# Altium PCB PCB1.PcbDoc
Units mil, origin at the board's own origin, x right, y up, seen from the top; angles counter-clockwise.
Board outline 2287.2 x 1638.61 mil, 2 copper layers (Top Layer, Bottom Layer), stack 65.792 mil thick; 4 components, 11 nets, 51 pads, 4 vias.
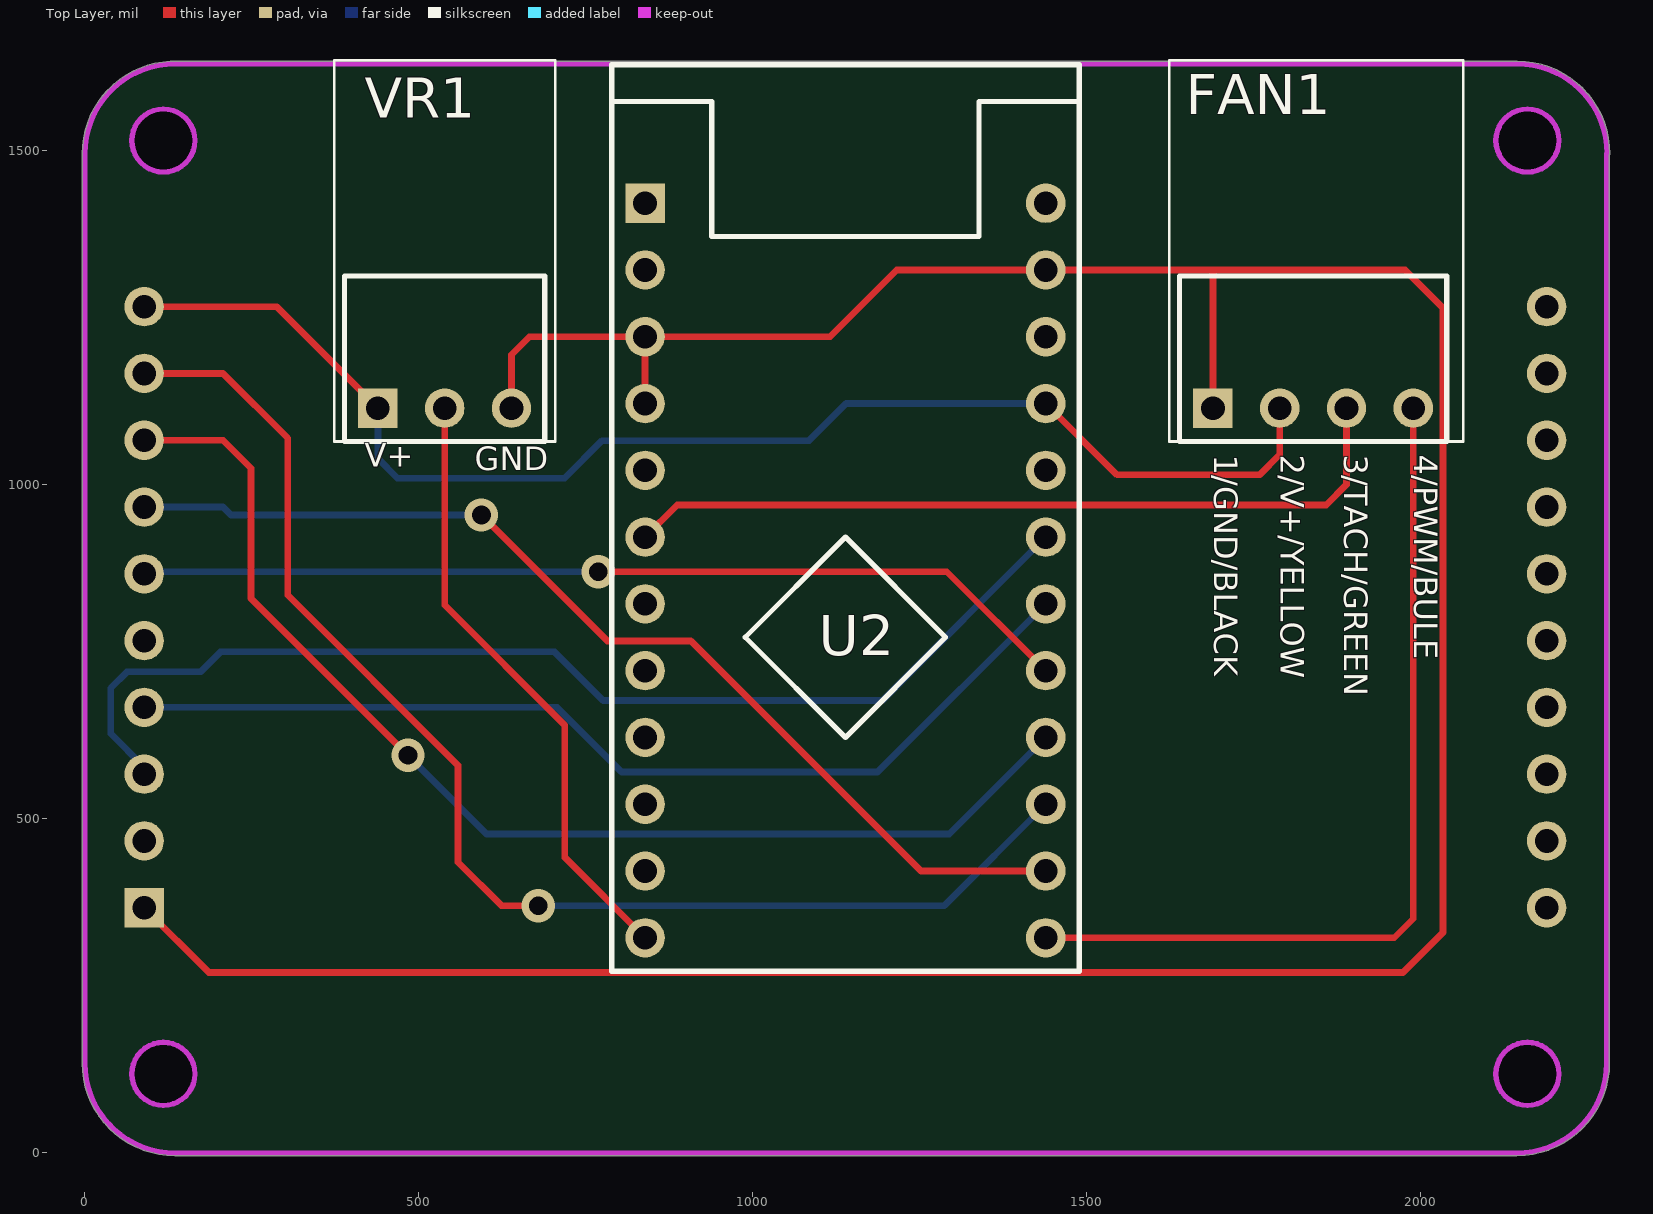
[diagram p0: Top Layer view]
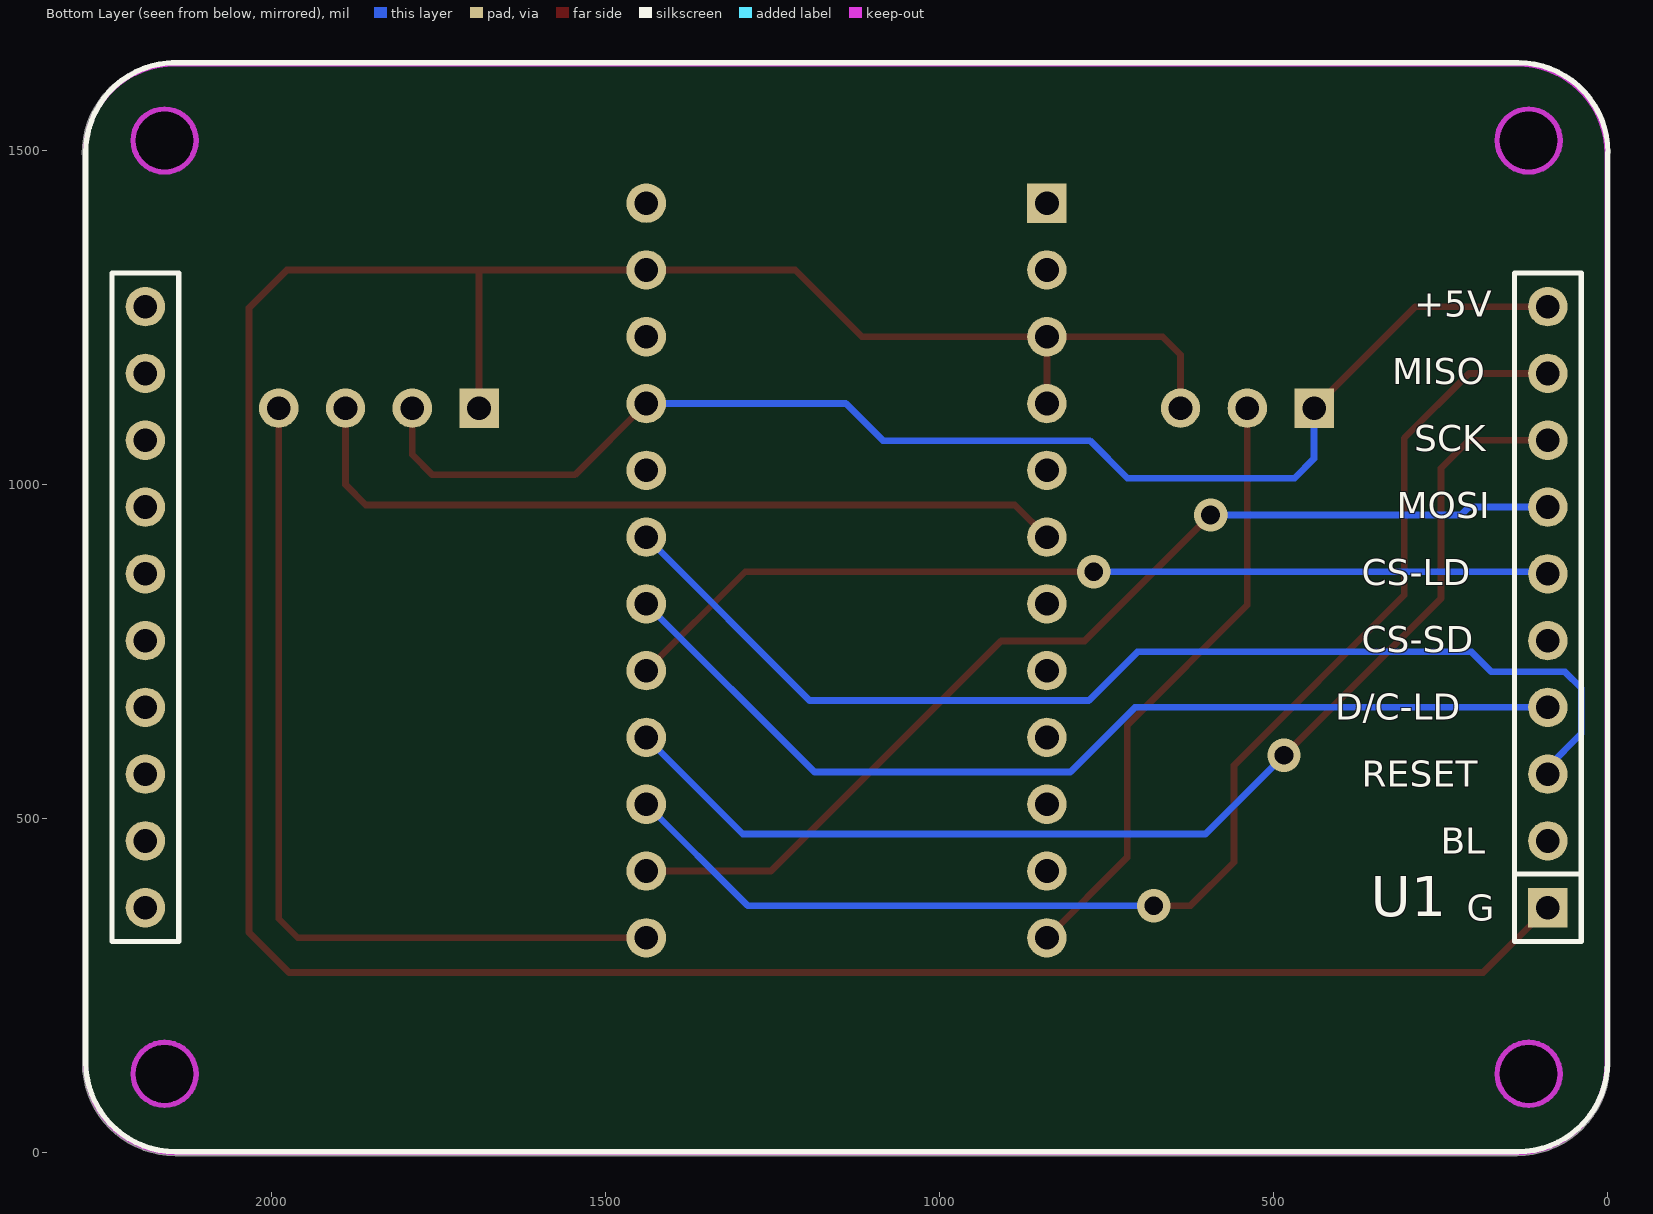
[diagram p1: Bottom Layer view, seen from below]

## Layer stack, top to bottom
Top Layer: signal copper 1.4
Dielectric: core 62.9921, FR-4, Dk 4.8
Bottom Layer: signal copper 1.4

## Board outline
-3.32,134.06 -3.32,1495.94 cw(c135.05,1495.94) 128.7,1634.16 cw(c129.76,1630.35) 129.76,1634.31 2145.51,1634.31 cw(c2145.51,1495.94) 2283.88,1495.94 cw(c2279.93,1495.94) 2283.32,1493.91 2283.32,134.06 cw(c2144.95,134.06) 2144.95,-4.31 135.05,-4.31 cw(c135.05,134.06)
cut-out: 2207.87,118.11 cw(c2160.63,118.11) 2160.63,70.87 cw(c2160.63,118.11) 2113.39,118.11 cw(c2160.63,118.11) 2160.63,165.35 cw(c2160.63,118.11)
cut-out: 2207.87,1515.59 ccw(c2160.63,1515.59) 2160.63,1562.83 ccw(c2160.63,1515.59) 2113.39,1515.59 ccw(c2160.63,1515.59) 2160.63,1468.35 ccw(c2160.63,1515.59)
cut-out: 70.87,1515.59 cw(c118.11,1515.59) 118.11,1562.83 cw(c118.11,1515.59) 165.35,1515.59 cw(c118.11,1515.59) 118.11,1468.35 cw(c118.11,1515.59)
cut-out: 70.87,118.11 ccw(c118.11,118.11) 118.11,70.87 ccw(c118.11,118.11) 165.35,118.11 ccw(c118.11,118.11) 118.11,165.35 ccw(c118.11,118.11)

## Design rules (kind name [scope] priority, off if disabled: settings)
Clearance [All] p1: gap=10
ComponentClearance [All] p1: gap=0 collisioncheckmode=3 verticalgap=0 showdistances=FALSE
PolygonConnect [All] p1: connectstyle=Relief reliefconductorwidth=10 reliefentries=4 polygonreliefangle="90 Angle"
RoutingVias [All] p1: holewidth=28 width=50 viastyle="Through Hole" minholewidth=28 minwidth=50 maxholewidth=28 maxwidth=50
SilkToSilkClearance [All] p1: silktosilkclearance=0
SilkscreenOverComponentPads [All] p1: minsilkscreentomaskgap=0
SolderMaskExpansion [All] p1: expansion=4
Width [All] p1: maxlimit=10 minlimit=10 preferedwidth=10
25 further rules are at their usual default settings.

## Components (designator, comment, footprint, x,y, rotation, side; value= is the part's Value field where it differs from the comment)
FAN1 "4WIRE FAN" "WR-WTB 2,54mm 1X4" 1689.72,1114.96 r0 top
U1 "TFTLCD" TFTLCD 1139.37,816.85 r180 bottom locked
U2 "Pro Micro" PROMICRO 1139.37,871.81 r0 top locked
VR1 "3590S-2-103L" "WR-WTB 2,54mm 1X3" 439.37,1114.96 r0 top

## Footprints (in the part's own frame and the unit in brackets; to place one, negate y for a bottom-side part, rotate by r counter-clockwise, add the part's x,y. Pads: shape width x height; smd on the part's side, far side on the other; paste and mask are expansions set on the pad)
PROMICRO [mm]
  rect 1.5x1.5 hole 0.9: 1(-7.62,13.97)
  round 1.5 hole 0.9: 2(-7.62,11.43) 3(-7.62,8.89) 4(-7.62,6.35) 5(-7.62,3.81) 6(-7.62,1.27) 7(-7.62,-1.27) 8(-7.62,-3.81) 9(-7.62,-6.35) 10(-7.62,-8.89) 11(-7.62,-11.43) 12(-7.62,-13.97) 13(7.62,-13.97) 14(7.62,-11.43) 15(7.62,-8.89) 16(7.62,-6.35) 17(7.62,-3.81) 18(7.62,-1.27) 19(7.62,1.27) 20(7.62,3.81) 21(7.62,6.35) 22(7.62,8.89) 23(7.62,11.43) 24(7.62,13.97)
  silkscreen extent -8.89,-15.24 8.89,19.24
TFTLCD [mm]
  round 1.5 hole 0.9: 0(-26.67,-11.43) 0(-26.67,-8.89) 0(-26.67,-6.35) 0(-26.67,-3.81) 0(-26.67,-1.27) 0(-26.67,1.27) 0(-26.67,3.81) 0(-26.67,6.35) 0(-26.67,8.89) 0(-26.67,11.43) 2(26.67,-8.89) 3(26.67,-6.35) 4(26.67,-3.81) 5(26.67,-1.27) 6(26.67,1.27) 7(26.67,3.81) 8(26.67,6.35) 9(26.67,8.89) 10(26.67,11.43)
  rect 1.5x1.5 hole 0.9: 1(26.67,-11.43)
  silkscreen extent -28.94,-20.71 28.95,20.71
"WR-WTB 2,54mm 1X3" [mm] "WR-WTB 2,54mm"
  rect 1.5x1.5 hole 0.9: 1(0,0)
  round 1.5 hole 0.9: 2(2.54,0) 3(5.08,0)
  silkscreen extent -1.66,-1.27 6.74,13.23, body extent -1.27,-0.3 6.35,13.22, height 8.9
"WR-WTB 2,54mm 1X4" [mm] "WR-WTB 2.54 mm Male Locking Header"
  rect 1.5x1.5 hole 0.9: 1(0,0)
  round 1.5 hole 0.9: 2(2.54,0) 3(5.08,0) 4(7.62,0)
  silkscreen extent -1.66,-1.27 9.53,13.23, body extent -1.27,-0.3 6.35,13.22, height 8.9

## Part data
FAN1: library part 4-WIRE_FAN
U2: library part ProMicro

## Via types
v1: diameter 50, hole 28, Top Layer to Bottom Layer, 4 vias

## Nets (pads, with @x,y where several pads share a name; then routed paths per layer and width w, separated by ;. In a path a pad name is that pad's centre, name@x,y a point inside that pad or via, vN(x,y) a via of type N, cw(c..) or ccw(c..) an arc to the next point about the centre after c; other vN are vias at no path point)
CS-LD: U1.6 U2.17 | length 1412.7
  Top Layer w10: v1(769.37,869.96) 1291.22,869.96 U2.17
  Bottom Layer w10: U1.6 92.48,869.96 v1(769.37,869.96)
D/C-LD: U1.4 U2.18 | length 1494.5
  Bottom Layer w10: U1.4 707.48,666.85 804.37,569.96 1187.52,569.96 U2.18
GND: FAN1.1 U1.1 U2.3 U2.4 U2.23 VR1.3 | length 4802.8
  Top Layer w10: U1.1 186.26,269.96 1974.37,269.96 2034.25,329.84 2034.25,1265.08 1977.52,1321.81 1689.72,1321.81 ; VR1.3 639.37,1194.96 666.22,1221.81 1116.22,1221.81 1216.22,1321.81 U2.23 1689.72,1321.81 ; U2.4 U2.3 ; FAN1.1 1689.72,1321.81
MISO: U1.9 U2.15 | length 1965.6
  Top Layer w10: U1.9 207.48,1166.85 304.37,1069.96 304.37,834.96 559.37,579.96 559.37,434.96 624.37,369.96 v1(679.37,369.96)
  Bottom Layer w10: v1(679.37,369.96) 1287.52,369.96 U2.15
MOSI: U1.7 U2.14 | length 1575.8
  Top Layer w10: v1(594.37,954.96) 782.99,766.34 907.99,766.34 1252.52,421.81 U2.14
  Bottom Layer w10: U1.7 207.48,966.85 219.37,954.96 v1(594.37,954.96)
NetU2_12: U2.12 VR1.2 | length 917.4
  Top Layer w10: VR1.2 539.37,819.96 719.37,639.96 719.37,441.81 U2.12
PWM: FAN1.4 U2.13 | length 1326.8
  Top Layer w10: U2.13 1961.22,321.81 1989.72,350.32 FAN1.4
RESET: U1.3 U2.19 | length 1703.4
  Bottom Layer w10: U1.3 89.37,577.8 39.37,627.8 39.37,695.63 63.74,720 173.74,720 203.66,749.92 703.94,749.92 776.57,677.28 1194.84,677.28 U2.19
SCK: U1.8 U2.16 | length 1768.3
  Top Layer w10: U1.8 207.48,1066.85 249.37,1024.96 249.37,829.96 v1(484.37,594.96)
  Bottom Layer w10: v1(484.37,594.96) 602.05,477.28 1294.84,477.28 U2.16
TACH: FAN1.3 U2.6 | length 1197.5
  Top Layer w10: U2.6 887.52,969.96 1859.37,969.96 1889.72,1000.32 FAN1.3
VCC: FAN1.2 U1.10 U2.21 VR1.1 | length 2023.8
  Top Layer w10: U1.10 287.48,1266.85 VR1.1 ; U2.21 1546.22,1014.96 1759.37,1014.96 1789.72,1045.32 FAN1.2
  Bottom Layer w10: VR1.1 439.37,1039.37 468.74,1010 718.74,1010 775.08,1066.34 1085.08,1066.34 1140.55,1121.81 U2.21
pads on no net: U1.0 U1.2 U1.5 U2.1 U2.2 U2.5 U2.7 U2.8 U2.9 U2.10 U2.11 U2.20 U2.22 U2.24

## Keep-outs
Keep-Out Layer:
  circle w7.87: c2160.63,118.11 r47.24
  circle w7.87: c2160.63,1515.59 r47.24
  circle w7.87: c118.11,1515.59 r47.24
  circle w7.87: c118.11,118.11 r47.24
  lines w7.87: 129.76,1630.35 2145.51,1630.35 cw(c2145.51,1495.94) 2279.93,1495.94 ; 135.05,1630.35 ccw(c135.05,1495.94) 0.63,1495.94 0.63,134.06 ccw(c135.05,134.06) 135.05,-0.35 2144.95,-0.35 ccw(c2144.95,134.06) 2279.37,134.06 2279.37,1495.94

## Silkscreen, mask and mechanical layers (free items; w line width, h text height)
Top Overlay:
  text "1/GND/BLACK" at 1679.37,1044.96 h60 r270
  text "2/V+/YELLOW" at 1779.37,1044.96 h60 r270
  text "3/TACH/GREEN" at 1874.37,1044.96 h60 r270
  text "4/PWM/BULE" at 1979.37,1044.96 h60 r270
  text "V+" at 419.37,1014.96 h60
  text "GND" at 584.37,1009.96 h60

## Text inside footprints (layer, text, board x,y; h text height)
U1: Bottom Overlay "BL" at 250.01,447.65 h39.37; Bottom Overlay "RESET" at 368.08,548.13 h39.37; Bottom Overlay "D/C-LD" at 407.44,648.61 h39.37; Bottom Overlay "CS-SD" at 368.08,749.09 h39.37; Bottom Overlay "CS-LD" at 368.08,849.57 h39.37; Bottom Overlay "MOSI" at 315.61,950.05 h39.37; Bottom Overlay "SCK" at 289.37,1050.53 h39.37; Bottom Overlay "MISO" at 322.17,1151.02 h39.37; Bottom Overlay "+5V" at 289.37,1251.5 h39.37; Bottom Overlay "G" at 210.66,347.17 h39.37